# Altium PCB BQ25895BMS.PcbDoc
Units mm, origin at the board's own origin, x right, y up, seen from the top; angles counter-clockwise.
Board outline 30 x 30 mm, 2 copper layers (Top Layer, Bottom Layer); 37 components, 20 nets, 106 pads, 40 vias.
Unrouted connection lines stored in the file: 65.
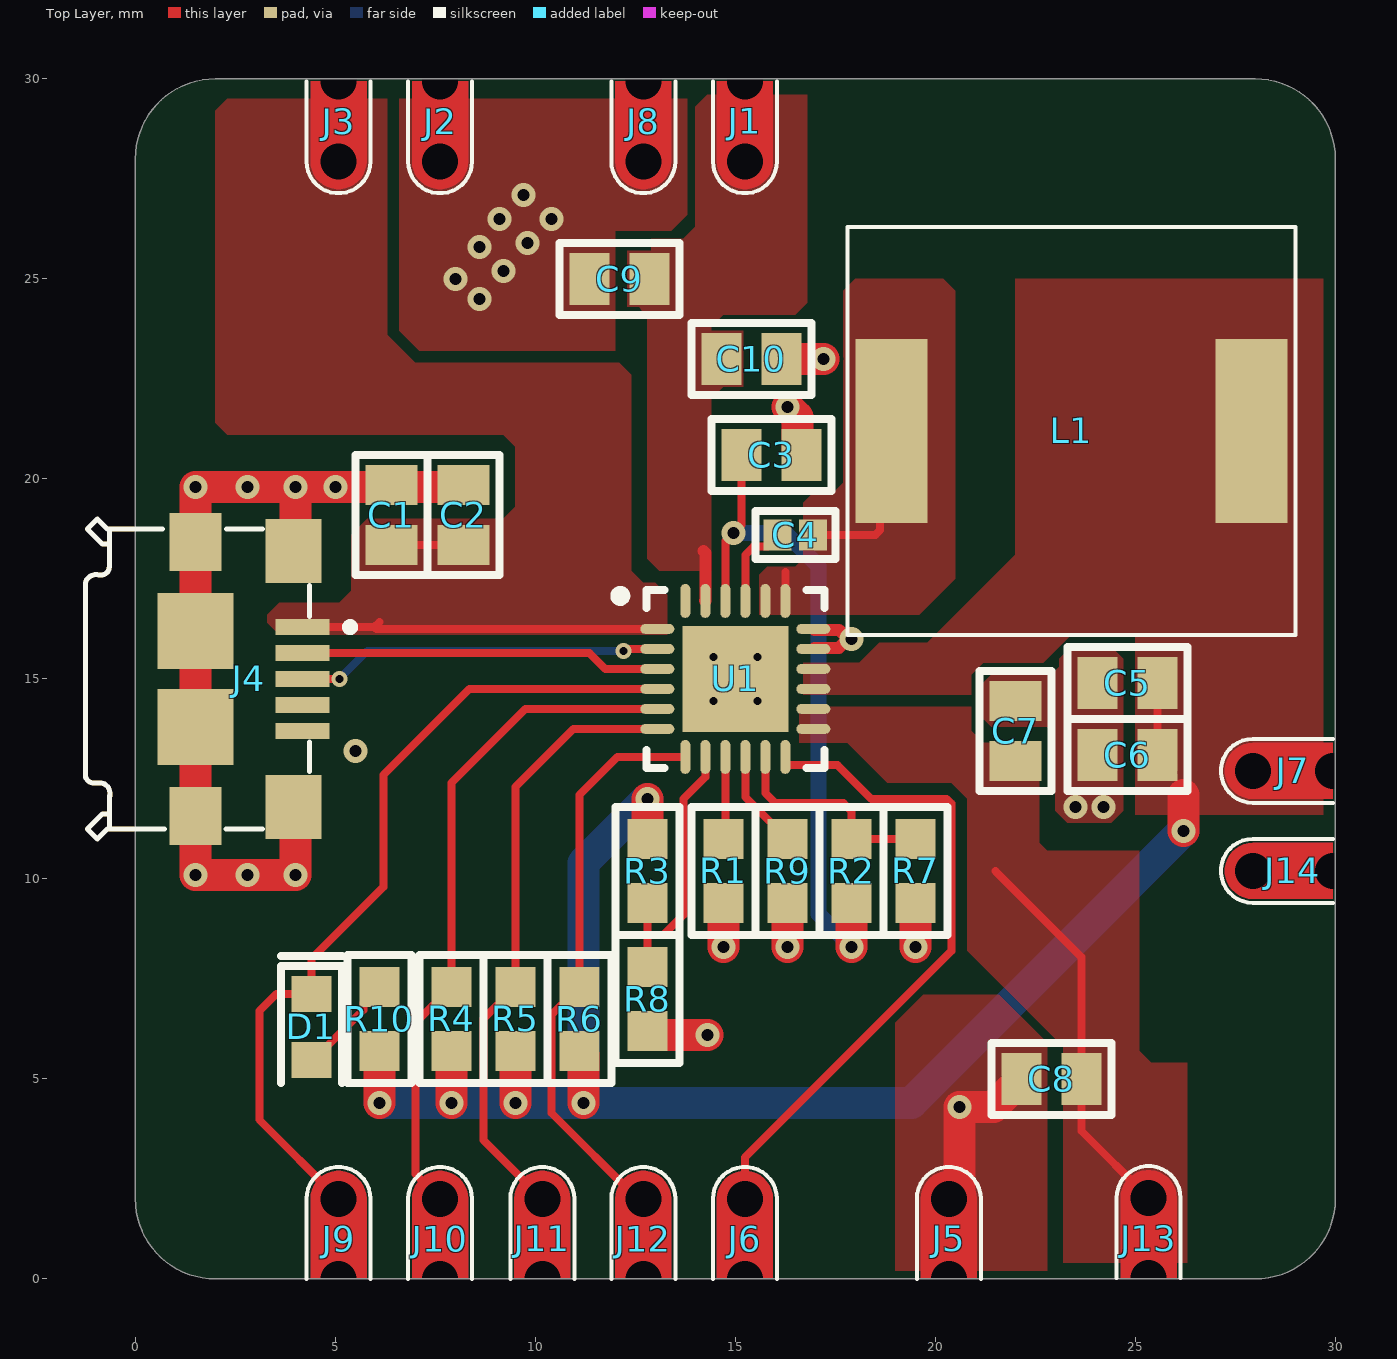
[diagram p0: Top Layer view]
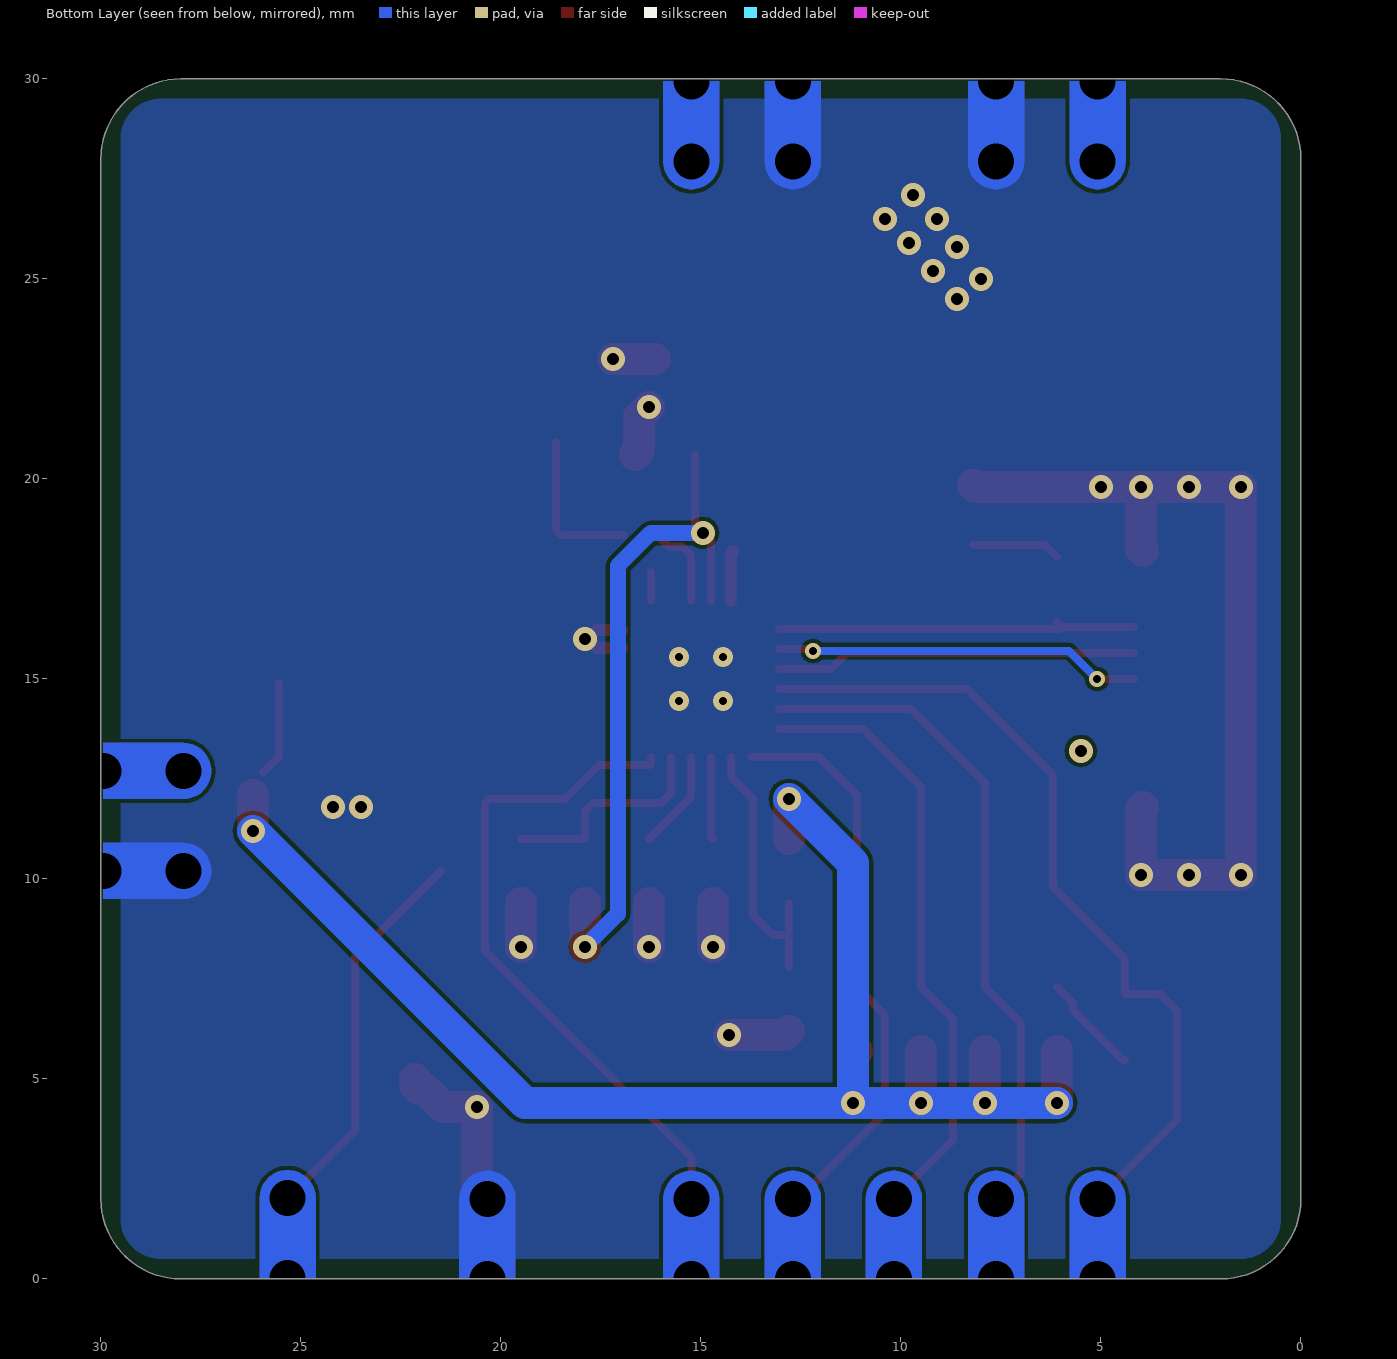
[diagram p1: Bottom Layer view, seen from below]

## Layer stack, top to bottom
Top Solder: solder mask 0.0102, Solder Resist, Dk 3.5
Top Layer: signal copper 0.0356
Dielectric 1: dielectric 0.32, FR-4, Dk 4.8
Bottom Layer: signal copper 0.0356
Bottom Solder: solder mask 0.0102, Solder Resist, Dk 3.5

## Board outline
2,0 cw(c2,2) 0,2 0,28 cw(c2,28) 2,30 28,30 cw(c28,28) 30,28 30,2 cw(c28,2) 28,0

## Design rules (kind name [scope] priority, off if disabled: settings)
Clearance [All] p1: gap=0.1 ignorepadtopadclearanceinfootprint=FALSE
DiffPairsRouting USB [InDifferentialPair('USB')] p1: maxlimit=0.2 minlimit=0.2 mostfreqgap=0.2 toplayer_minwidth=0.2 toplayer_maxwidth=0.2 toplayer_prefwidth=0.2 bottomlayer_minwidth=0.2 bottomlayer_maxwidth=0.2 bottomlayer_prefwidth=0.2 maxuncoupledlength=12.7
MinimumSolderMaskSliver [All] p1: minsoldermaskwidth=0.1
PlaneConnect [All] p1: planeconnectstyle=Direct reliefexpansion=0.508 reliefentries=4 reliefconductorwidth=0.254 reliefairgap=0.254
PolygonConnect [All] p1: connectstyle=Direct reliefconductorwidth=0.254 reliefentries=4 polygonreliefangle="90 Angle" airgapwidth=0.254
RoutingVias [All] p1: holewidth=0.711 width=1.27 viastyle="Through Hole" minholewidth=0.711 minwidth=1.27 maxholewidth=0.711 maxwidth=1.27
SilkToSilkClearance [All] p1: silktosilkclearance=0.1
SilkToSolderMaskClearance [IsPad] p1: minsilkscreentomaskgap=0.1 clearancetoexposedcopper=TRUE
SolderMaskExpansion [All] p1: expansion=0.102 istentingtop=FALSE
UnRoutedNet [All] p1 off:
Width [All] p1: maxlimit=4 minlimit=0.1 preferedwidth=0.1
24 further rules are at their usual default settings.

## Classes and differential pairs
differential pair USB: +USB_P -USB_N

## Components (designator, comment, footprint, x,y, rotation, side; value= is the part's Value field where it differs from the comment)
C1 "10uF(0603 in )" Capacitor_0603 6.4,19.1 r270 top
C2 "0.1uf(25V)" Capacitor_0603 8.2,19.1 r270 top
C3 "4.7uF(16V)" Capacitor_0603 15.9,20.6 r180 top
C4 "4.7uF(16V)" CAPACITOR_0402 16.5,18.6 r180 top
C5 "10uF(0603 in )" Capacitor_0603 24.8,14.9 r0 top
C6 "10uF(0603 in )" Capacitor_0603 24.8,13.1 r0 top
C7 "10uF(0603 in )" Capacitor_0603 22,13.7 r270 top
C8 "0.1uf(25V)" Capacitor_0603 22.9,5 r0 top
C9 "10uF(0603 in )" Capacitor_0603 12.1,25 r0 top
C10 "10uF(0603 in )" Capacitor_0603 15.4,23 r180 top
D1 "Green LED" 0603_LED 4.4,6.3 r90 top
J1 "CS" CASTELLATED_SMALL 15.24,29.94 r180 top
J2 "CS" CASTELLATED_SMALL 7.62,29.94 r180 top
J3 "CS" CASTELLATED_SMALL 5.08,29.94 r180 top
J4 "Micro USB" TE_1981568-1 1.5,15 r270 top
J5 "CS" CASTELLATED_SMALL 20.337,0 r0 top
J6 "CS" CASTELLATED_SMALL 15.24,0 r0 top
J7 "CS" CASTELLATED_SMALL 29.94,12.7 r90 top
J8 "CS" CASTELLATED_SMALL 12.7,29.94 r180 top
J9 "CS" CASTELLATED_SMALL 5.08,0 r0 top
J10 "CS" CASTELLATED_SMALL 7.62,0 r0 top
J11 "CS" CASTELLATED_SMALL 10.174,0 r0 top
J12 "CS" CASTELLATED_SMALL 12.7,0 r0 top
J13 "CS" CASTELLATED_SMALL 25.332,0.02 r0 top
J14 "CS" CASTELLATED_SMALL 29.94,10.2 r90 top
L1 "2.2uH" "22uh inductor" 23.4,21.2 r0 top
R1 "10K" RESISTOR0603 14.7,10.2 r90 top
R2 "10K" RESISTOR0603 17.9,10.2 r270 top
R3 "10K" RESISTOR0603 12.8,10.2 r90 top
R4 "10K" RESISTOR0603 7.9,6.5 r270 top
R5 "10K" RESISTOR0603 9.5,6.5 r270 top
R6 "10K" RESISTOR0603 11.1,6.5 r270 top
R7 "10K" RESISTOR0603 19.5,10.2 r90 top
R8 "0R(0603 in )" RESISTOR0603 12.8,7 r90 top
R9 "0R(0603 in )" RESISTOR0603 16.3,10.2 r90 top
R10 "10K" RESISTOR0603 6.1,6.5 r270 top
U1 "BQ25895RTWR" 24-WQFN 15,15 r0 top

## Footprints (in the part's own frame and the unit in brackets; to place one, negate y for a bottom-side part, rotate by r counter-clockwise, add the part's x,y. Pads: shape width x height; smd on the part's side, far side on the other; paste and mask are expansions set on the pad)
"22uh inductor" [mm]
  rect 1.8x4.6 smd: 1(-4.5,0) 2(4.5,0)
  silkscreen extent -5.6,-5.1 5.6,5.1, body extent -5,-5 5,5, height 2.8
24-WQFN [mm] "24 Pin WQFN Package"
  oval 0.85x0.25 smd: 1(-1.95,1.25) 2(-1.95,0.75) 3(-1.95,0.25) 4(-1.95,-0.25) 5(-1.95,-0.75) 6(-1.95,-1.25) 13(1.95,-1.25) 14(1.95,-0.75) 15(1.95,-0.25) 16(1.95,0.25) 17(1.95,0.75) 18(1.95,1.25)
  oval 0.25x0.85 smd: 7(-1.25,-1.95) 8(-0.75,-1.95) 9(-0.25,-1.95) 10(0.25,-1.95) 11(0.75,-1.95) 12(1.25,-1.95) 19(1.25,1.95) 20(0.75,1.95) 21(0.25,1.95) 22(-0.25,1.95) 23(-0.75,1.95) 24(-1.25,1.95)
  rect 2.65x2.65 smd: 25(0,0)
  silkscreen extent -3,-2.22 2.22,2.23, body extent -2.12,-2.12 2.12,2.12, height 0.8
0603_LED [mm] "SMD 0603 LED"
  rect 0.9x1 smd: 1(-0.825,0) 2(0.825,0)
  silkscreen extent -1.4,-0.76 1.78,0.76, body extent -0.8,-0.4 0.8,0.4, height 0.96
CAPACITOR_0402 [mm] "0402 Capacitor"
  rect 0.7x0.78 smd: 1(-0.44,0) 2(0.44,0)
  silkscreen extent -1,-0.6 1,0.6, body extent -0.55,-0.3 0.55,0.3, height 0.5
Capacitor_0603 [mm] "Capacitor with 0603 (1608 Metric) Footprint"
  rect 1x1.3 smd: 1(-0.75,0) 2(0.75,0)
  silkscreen extent -1.5,-0.9 1.5,0.9, body extent -0.95,-0.55 0.95,0.55, height 0.8
CASTELLATED_SMALL [mm]
  round 0 hole 0.9: 1(0,2) 1(0,0)
  Multi-Layer region: -0.7,0 -0.7,2 -0.631,2.304 -0.436,2.547 -0.156,2.682 0.156,2.682 0.436,2.547 0.631,2.304 0.7,2 0.7,2 0.7,0
  silkscreen extent -0.8,0 0.8,2.8
RESISTOR0603 [mm]
  rect 1x1 smd: 1(-0.8,0) 2(0.8,0)
  silkscreen extent -1.6,-0.8 1.6,0.8, body extent -0.9,-0.45 0.9,0.45, height 0.45
TE_1981568-1 [mm]
  rect 0.4x1.35 smd: 1(-1.3,2.675) 2(-0.65,2.675) 3(0,2.675) 4(0.65,2.675) 5(1.3,2.675)
  rect 1.6x1.4 smd: 6(-3.2,2.45) 7(3.2,2.45)
  rect 1.45x1.3 smd: 8(3.425,0) 9(-3.425,0)
  rect 1.9x1.9 smd: 10(-1.2,0) 11(1.2,0)
  silkscreen extent -4,-2.75 4,3.97, body extent -4,-2.7 4,2.9, height 2.82

## Part data
C1 C5 C6 C7 C9 C10: library part GRM188R61E106KA73D, "10µF ±10% 25V Ceramic Capacitor X5R 0603 (1608 Metric)", Manufacturer="Murata Electronics", MaxTemp=85°C, MinTemp=-55°C, SupplierPartNumber=490-18214-1-ND, ComponentLink1Description=SupplierURL, ComponentLink1URL=https://www.digikey.com/en/products/detail/murata-electronics/GRM188R61E106KA73D/9867922, ManufacturerPartNumber=GRM188R61E106KA73D, PartStatus=Active, Price=0.32, Supplier=Digikey
C2 C8: library part C0603C104J3RAC7411, "±5% 25V Ceramic Capacitor X7R 0603 (1608 Metric)", Manufacturer=KEMET, MaxTemp=125°C, MinTemp=-55°C, SupplierPartNumber=399-C0603C104J3RAC7411CT-ND, ComponentLink1Description=SupplierURL, ComponentLink1URL=https://www.digikey.com/en/products/detail/kemet/C0603C104J3RAC7411/12701256, ManufacturerPartNumber=C0603C104J3RAC7411, PartStatus=Active, Price=0.43, Supplier=Digikey
C3: library part GRM188C71C475KE21D, "4.7µF ±10% 16V Ceramic Capacitor X7S 0603 (1608 Metric)", Manufacturer="Murata Electronics", MaxTemp=125°C, MinTemp=-55°C, SupplierPartNumber=490-16337-1-ND, ManufacturerPartNumber=GRM188C71C475KE21D, PartStatus=Active, Price=0.38, Supplier=Digikey
C4: library part 0402YD475MAT2A, "4.7µF ±20% 16V Ceramic Capacitor X5R 0402 (1005 Metric)", Manufacturer="AVX Corporation", MaxTemp=85°C, MinTemp=-55°C, SupplierPartNumber=478-10788-1-ND, ComponentLink1Description=SupplierURL, ComponentLink1URL=https://www.digikey.com/en/products/detail/avx-corporation/0402YD475MAT2A/6221357, ManufacturerPartNumber=0402YD475MAT2A, PartStatus=Active, Price=0.29, Supplier=Digikey
D1: library part APHD1608LZGCK, "Green 570nm LED Indication - Discrete 1.7V 0603 (1608 Metric)", MaxTemp=+85, MinTemp=-40, SupplierPartNumber=754-2036-1-ND, ComponentLink1Description=SupplierURL, ComponentLink1URL=https://www.digikey.com/en/products/detail/kingbright/APHD1608LZGCK/7043068, ManufacturerPartNumber=APHD1608LZGCK, PartStatus=Active, Price=0.68
J1 J2 J3 J5 J6 J7 J8 J9 J10 J11 J12 J13 J14: library part castellated_Small
J4: library part 1981568-1, "USB - micro B USB 2.0 Receptacle Connector 5 Position Surface Mount, Right Angle", Manufacturer="TE Connectivity AMP Connectors", MaxTemp=85°C, MinTemp=-30°C, SupplierPartNumber=A97800CT-ND, ComponentLink1Description=SupplierURL, ComponentLink1URL=https://www.digikey.com/en/products/detail/te-connectivity-amp-connectors/1981568-1/1786248, ManufacturerPartNumber=1981568-1, PartStatus=Active, Price=1.71, Supplier=Digikey
L1: library part 7440650022, "FIXED IND 2.2UH 6.2A 15 MOHM SMD", Manufacturer="Würth Elektronik", MaxTemp=125°C, MinTemp=-40, SupplierPartNumber=732-1055-1-ND, ComponentLink1Description=SupplierURL, ComponentLink1URL=https://www.digikey.com/en/products/detail/würth-elektronik/7440650022/1638460, ManufacturerPartNumber=7440650022, Price=1.80, Supplier=Digikey
R1 R2 R3 R4 R5 R6 R7 R10: library part RMCF0603JT10K0, "10 kOhms ±5% 0.1W, 1/10W Chip Resistor 0603 (1608 Metric) Automotive AEC-Q200 Thick Film", Manufacturer="Stackpole Electronics Inc", MaxTemp=155°C, MinTemp=-55°C, SupplierPartNumber=RMCF0603JT10K0CT-ND, ComponentLink1Description=SupplierURL, ComponentLink1URL=https://www.digikey.com/en/products/detail/stackpole-electronics-inc/RMCF0603JT10K0/1758104, ManufacturerPartNumber=RMCF0603JT10K0, PartStatus=Active, Price=0.10, Supplier=Digikey
R8 R9: library part RMCF0603ZT0R00, "0 Ohms Jumper 0.1W, 1/10W Chip Resistor 0603 (1608 Metric) Automotive AEC-Q200 Thick Film", Max Temp=155°C, Min Temp=-55°C, Supplier Part Number=RMCF0603ZT0R00CT-ND, ComponentLink1Description="Supplier Link", ComponentLink1URL=https://www.digikey.com/en/products/detail/stackpole-electronics-inc/RMCF0603ZT0R00/1756908, Manufacturer Part Number=RMCF0603ZT0R00, Part Status=Active, Price=0.10
U1: "Charger IC Lithium Ion/Polymer 24-WQFN (4x4)", Manufacturer="Texas Instruments", MaxTemp=85°C, MinTemp=-40°C, SupplierPartNumber=296-44345-1-ND, ComponentLink1Description=SupplierURL, ComponentLink1URL=https://www.digikey.com/en/products/detail/texas-instruments/BQ25895RTWR/5214018, ManufacturerPartNumber=BQ25895RTWR, PartStatus=Active, Price=3.46, Supplier=Digikey

## Via types
v1: diameter 0.6/0.6 (per signal layer), hole 0.3, Top Layer to Bottom Layer, tented both sides, 34 vias
v2: diameter 0.5, hole 0.2, Top Layer to Bottom Layer, 4 vias
v3: diameter 0.4/0.4 (per signal layer), hole 0.2, Top Layer to Bottom Layer, tented both sides, 2 vias

## Nets (pads, with @x,y where several pads share a name; then routed paths per layer and width w, separated by ;. In a path a pad name is that pad's centre, name@x,y a point inside that pad or via, vN(x,y) a via of type N, cw(c..) or ccw(c..) an arc to the next point about the centre after c; other vN are vias at no path point)
BQ25895_\Q\O\N\: J6.1 U1.12 | length 16.8
  Top Layer w0.2: 15.24,2 15.24,3.04 20.4,8.2 20.4,11.883 20.283,12 18.4,12 17.55,12.85 16.273,12.85 16.25,12.873 U1.12
BQ25895_BAT: C7.2 C8.2 J13.1 U1.13 U1.14 | length 9.8
  Top Layer w0.2: 21.5,10.2 23.65,8.05 C8.2 23.65,3.702 25.332,2.02
BQ25895_ILIM: R9.2 U1.10 | length 2.5
  Top Layer w0.2: U1.10 15.25,12.05 R9.2
BQ25895_INT: J12.1 R6.1 U1.7 | length 14.5
  Top Layer w0.2: 12.7,2 12.551,2 10.4,4.151 10.4,6.6 R6.1 11.1,12.1 12.05,13.05 U1.7
BQ25895_OTG: R3.1 R8.2 U1.8 | length 6.9
  Top Layer w0.2: R8.2 12.8,8.6 ; R3.1 12.8,8.6 ; U1.8 14.249,12.549 13.7,12 13.7,9.1 13.2,8.6 12.8,8.6
BQ25895_PMID: C9.2 C10.2 J1.1 U1.23 | length 1.3
  Top Layer w0.3: 14.2,18.2 14.25,18.15 14.25,16.964 14.243,16.957 U1.23
BQ25895_SCL: J10.1 R4.1 U1.5 | length 16.9
  Top Layer w0.2: 7.62,2 7,2.62 7,6.4 R4.1 7.9,12.4 9.75,14.25 U1.5
BQ25895_SDA: J11.1 R5.1 U1.6 | length 15.4
  Top Layer w0.2: 10.174,2 8.7,3.474 8.7,6.5 R5.1 9.5,12.3 10.95,13.75 U1.6
BQ25895_STAT: D1.2 J9.1 U1.4 | length 21
  Top Layer w0.2: 5.08,2 3.1,3.98 3.1,6.7 3.525,7.125 D1.2 4.4,8 6.2,9.8 6.2,12.6 8.35,14.75 U1.4
BQ25895_SYS: C5.2 C6.2 J7.1 L1.2 R3.2 R4.2 R5.2 R6.2 R10.2 U1.15 U1.16 | length 40.7
  Top Layer w0.2: C5.2 C6.2 25.55,13.057 C6.2@25.95,12.657
  Top Layer w0.8: v1(6.1,4.4) R10.2 ; v1(7.9,4.4) R4.2 ; v1(9.5,4.4) R5.2 ; R6.2 11.2,5.6 v1(11.2,4.4) ; R3.2 v1(12.8,12) ; v1(26.2,11.2) 26.2,12.1
  Bottom Layer w0.8: v1(6.1,4.4) v1(7.9,4.4) v1(9.5,4.4) v1(11.2,4.4) ; v1(12.8,12) 11.2,10.4 v1(11.2,4.4) ; v1(26.2,11.2) 19.4,4.4 v1(11.2,4.4)
BQ25895_TS: R2.1 R7.2 U1.11 | length 5.5
  Top Layer w0.2: U1.11 15.75,12.15 16,11.9 17.7,11.9 17.9,11.7 R2.1 R7.2
GND: C1.1 C2.1 C3.1 C5.1 C6.1 C7.1 C8.1 C9.1 C10.1 J2.1 J4.5 J4.6 J4.7 J4.8 J4.9 J4.10 J4.11 J5.1 J8.1 J14.1 R1.1 R7.1 R8.1 R9.1 U1.17 U1.18 U1.25 | length 35.7
  Top Layer w0.3: U1.17@16.975,15.775 17.594,15.775 17.819,16 17.594,16.225 U1.18@16.975,16.225
  Top Layer w0.8: J4.7 4,11.75 v1(4,10.1) v1(2.8,10.1) v1(1.5,10.1) J4.8 J4.11 J4.10 J4.9 v1(1.5,19.8) v1(2.8,19.8) v1(4,19.8) ; J4.6 4,18.25 v1(4,19.8) ; C2.1 8.15,19.8 v1(5,19.8) v1(4,19.8) ; R8.1 12.9,6.1 v1(14.3,6.1) ; v1(14.7,8.3) R1.1 ; C10.1 v1(17.2,23) ; v1(16.3,8.3) R9.1 ; v1(16.3,21.8) 16.55,21.55 16.55,20.7 C3.1 ; v1(19.5,8.3) R7.1 ; 20.337,2 20.6,2.263 v1(20.6,4.3) 21.45,4.3 21.9,4.75 22.05,4.75 22.15,4.85 C8.1
  other v1: 23.5,11.8 24.2,11.8 17.9,16 8.6,24.5 8,25 9.2,25.2 8.6,25.8 9.8,25.9 9.1,26.5 10.4,26.5 9.7,27.1
  other v2: 14.45,14.45 15.55,14.45 14.45,15.55 15.55,15.55
NetC4_1: C4.1 L1.1 U1.19 U1.20 | length 4.7
  Top Layer w0.2: U1.19 16.25,17.675 ; C4.1 18.5,18.6 18.617,18.717 L1.1@18.617,20.917
NetC4_2: C4.2 U1.21 | length 2.2
  Top Layer w0.2: U1.21 15.25,18.1 15.46,18.31 15.81,18.31 16.06,18.56 C4.2
NetD1_1: D1.1 R10.1 | length 2.6
  Top Layer w0.2: D1.1 4.45,5.475 5.7,6.725 5.7,6.9 R10.1
NetR1_2: R1.2 U1.9 | length 2.1
  Top Layer w0.2: R1.2 14.75,11.05 U1.9
REGN: C3.2 R2.2 U1.22 | length 17.2
  Top Layer w0.2: U1.22 14.75,18.45 v1(14.95,18.65) 15.15,18.85 C3.2
  Top Layer w0.8: v1(17.9,8.3) R2.2
  Bottom Layer w0.4: v1(14.95,18.65) 16.25,18.65 17.075,17.825 17.075,9.125 v1(17.9,8.3)
USB_N: J4.2 U1.3 | length 9
  Top Layer w0.2: J4.2 11.35,15.65 11.75,15.25 U1.3
USB_P: J4.3 U1.2 | length 9.2
  Top Layer w0.2: J4.3 v3(5.1,15) ; v3(12.2,15.7) 12.254,15.7 12.304,15.75 U1.2
  Bottom Layer w0.2: v3(5.1,15) 5.8,15.7 v3(12.2,15.7)
VBUS: C1.2 C2.2 J3.1 J4.1 U1.1 | length 11.3
  Top Layer w0.2: J4.1 5.983,16.3 ; 6.1,16.417 5.983,16.3 ; C1.2@6.1,18.05 C1.2 C2.2 ; U1.1 6.033,16.25 5.983,16.3
pads on no net: J4.4 U1.24
copper on no net:
  other v1: 5.5,13.2

## Polygon pours and split planes (outlines as drawn)
GND on Top Layer "GND_L01_P016" (solid, remove dead copper, pour order 16): 22.8,5.9 21.6,7.1 19.7,7.1 19,6.4 19,0.2 22.8,0.2
GND on Top Layer "GND_L01_P015" (solid, remove dead copper, pour order 15): 6.6,29.5 6.6,23.7 7.1,23.2 12,23.2 12,26.2 13.4,26.2 13.8,26.6 13.8,29.5
BQ25895_BAT on Top Layer "BQ25895_BAT_L01_P014" (solid, remove dead copper, pour order 14): 16.6,14.3 20.9,14.3 20.9,13.7 21.2,13.4 22.3,13.4 22.6,13.1 22.6,10.9 22.8,10.7 25.1,10.7 25.1,5.7 25.4,5.4 26.3,5.4 26.3,0.4 23.2,0.4 23.2,5.8 20.8,8.2 20.8,12 20.4,12.4 18.8,12.4 17.8,13.4 16.6,13.4
BQ25895_SYS on Top Layer "BQ25895_SYS_L01_P013" (solid, remove dead copper, pour order 13): 25,11.6 29.7,11.6 29.7,25 25.1,25 25,24.9
BQ25895_SYS on Top Layer "BQ25895_SYS_L01_P011" (solid, remove dead copper, pour order 11): 16.7,15.4 16.7,14.6 20.9,14.6 20.9,15.1 21.2,15.4 22.7,15.4 23.4,16.1 28.8,16.1 28.8,25 22,25 22,18.1 19.8,15.9 18.6,15.9 18.1,15.4
NetC4_1 on Top Layer "NETC4_1_L01_P008" (solid, remove dead copper, pour order 8): 18,25 17.7,24.7 17.7,19.9 17.4,19.6 16.9,19.6 16.7,19.4 16.7,18 16.5,17.8 15.8,17.8 15.6,17.6 15.6,16.6 19.6,16.6 20.5,17.5 20.5,24.7 20.2,25
GND on Top Layer "GND_L01_P006" (solid, remove dead copper, pour order 6): 21.4,15.1 21.2,14.9 21.2,14 21.4,13.8 22.8,13.8 23,13.6 23,11.7 23.3,11.4 24.4,11.4 24.7,11.7 24.7,15.5 24.5,15.7 23.3,15.7 23.1,15.5 23.1,15.3 22.9,15.1
BQ25895_PMID on Top Layer "BQ25895_PMID_L01_P003" (solid, remove dead copper, pour order 3): 14.3,29.6 14,29.3 14,26.3 13.7,26 12.9,26 12.9,25.7 12.3,25.7 12.3,24.3 12.6,24.3 12.8,24 12.8,18 13.1,17.7 14.4,17.7 14.4,22 14.7,22.3 15.2,22.3 15.2,23.7 14.4,23.7 14.4,23.8 14.7,24.1 16.5,24.1 16.8,24.4 16.8,29.6
VBUS on Top Layer "VBUS_L01_P002" (solid, pour order 2): 2.3,29.5 2,29.2 2,21.4 2.3,21.1 9.2,21.1 9.5,20.8 9.5,19.3 9.2,19 5.8,19 5.4,18.6 5.4,17.2 5.1,16.9 3.6,16.9 3.3,16.6 3.3,16.4 3.6,16.1 13.3,16.1 13.3,17.1 13,17.4 12.7,17.4 12.4,17.7 12.4,22.6 12.1,22.9 7,22.9 6.3,23.6 6.3,29.5
GND on Bottom Layer "GND_L02_P017" (solid, remove dead copper, pour order 17): 0.5,28.5 cw(c1.5,28.5) 1.5,29.5 28.5,29.5 cw(c28.5,28.5) 29.5,28.5 29.5,1.5 cw(c28.5,1.5) 28.5,0.5 1.5,0.5 cw(c1.5,1.5) 0.5,1.5

## Text inside footprints (layer, text, board x,y; h text height)
J4: Mechanical 13 "PCB EDGE" at -0.526,16.144 h0.41 r270